# Altium PCB PCB1.PcbDoc
Units mil, origin at the board's own origin, x right, y up, seen from the top; angles counter-clockwise.
Board outline 3785 x 2850 mil, 2 copper layers (Top Layer, Bottom Layer); 22 components, 31 nets, 127 pads, 16 vias.
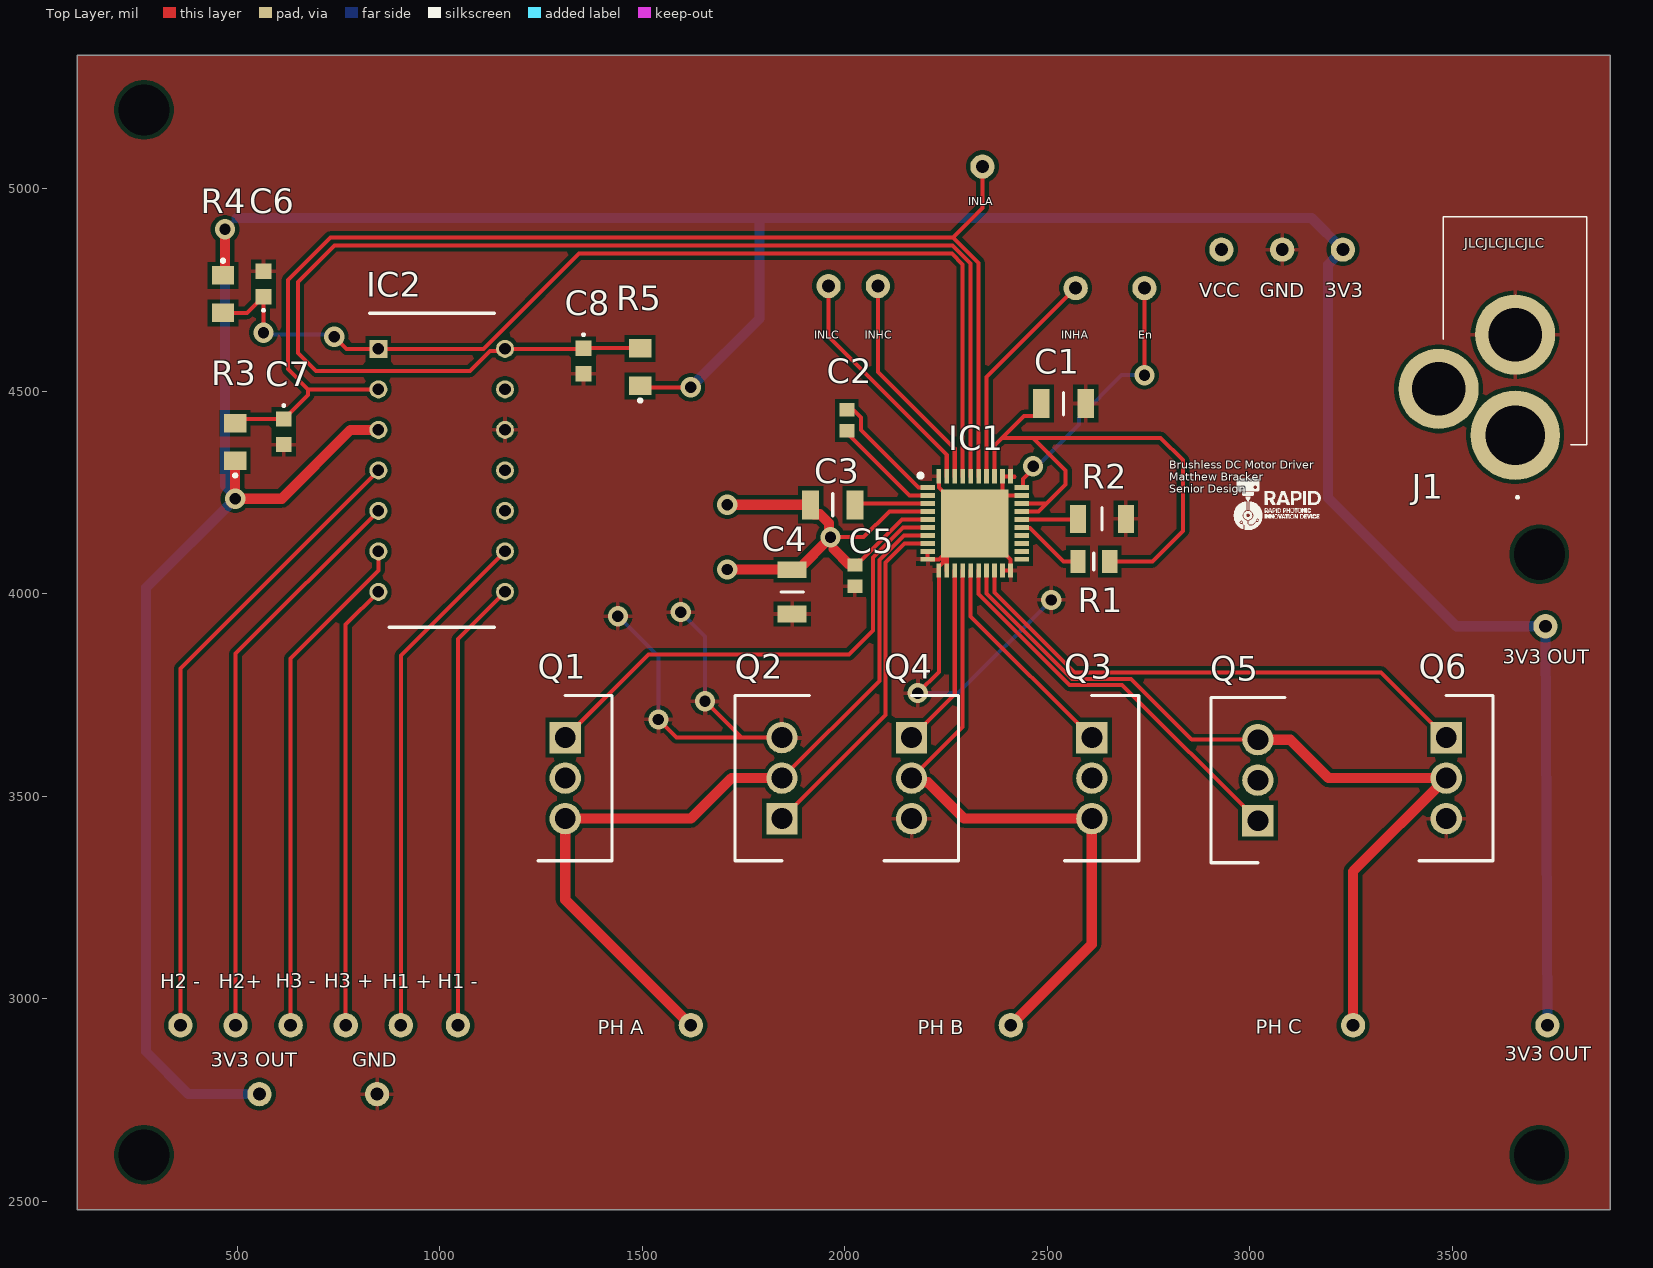
[diagram p0: Top Layer view]
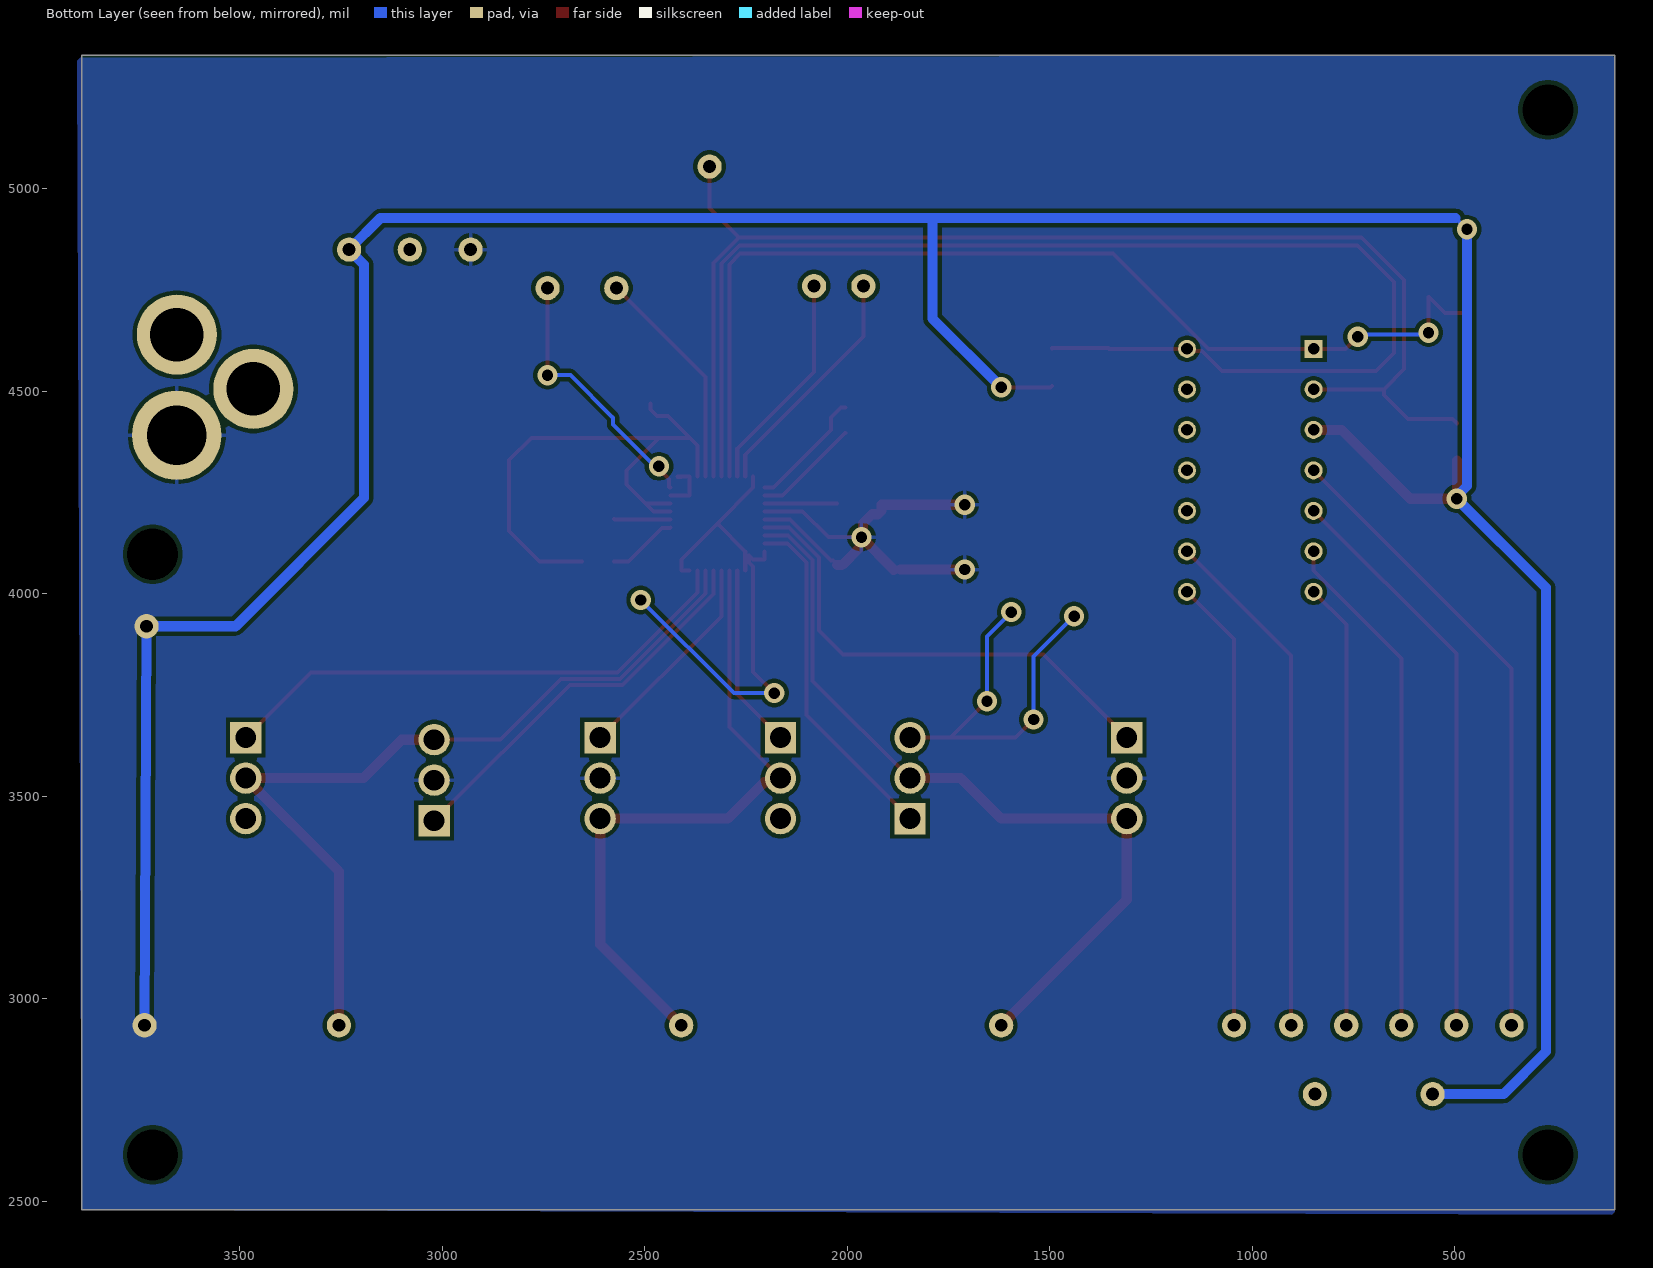
[diagram p1: Bottom Layer view, seen from below]
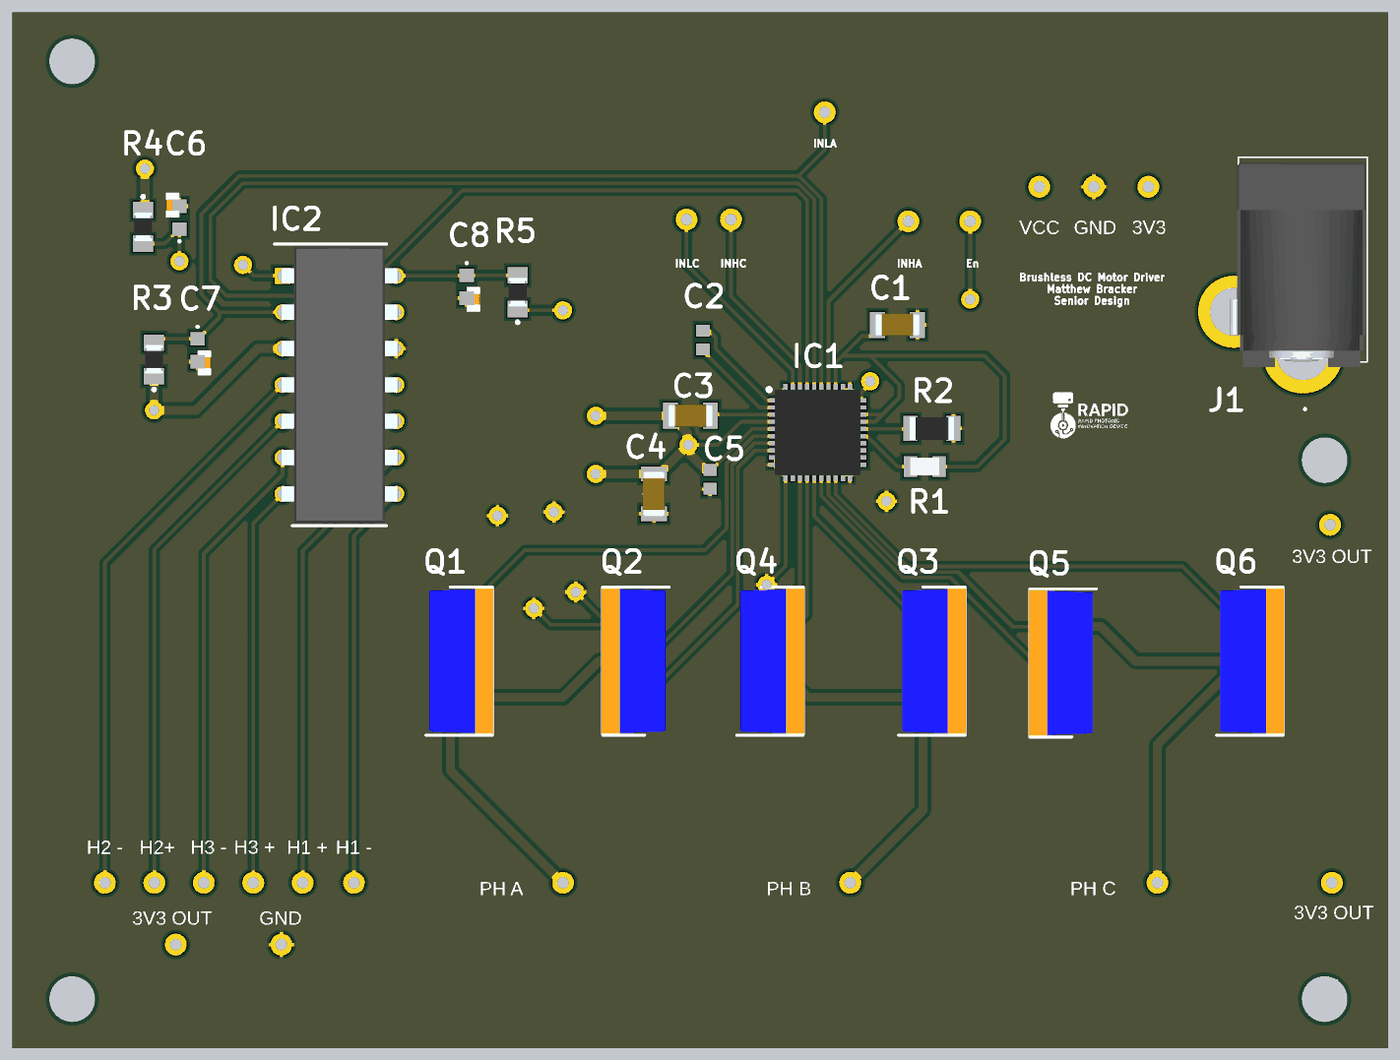
[diagram p2: 3D render of the assembled board from above, using the file's embedded part models]

## Layer stack, top to bottom
Top Solder: solder mask 0.4, Solder Resist, Dk 3.5
Top Layer: signal copper 1.4
Dielectric 1: dielectric 12.6, FR-4, Dk 4.8
Bottom Layer: signal copper 1.4
Bottom Solder: solder mask 0.4, Solder Resist, Dk 3.5

## Board outline
105,2480 3890,2480 3890,5330 105,5330

## Design rules (kind name [scope] priority, off if disabled: settings)
Clearance [All] p1: gap=10 ignorepadtopadclearanceinfootprint=FALSE except(3.94: Arc-SMDPad Track-SMDPad; 5: Arc-Arc Arc-Track Track-Track SMDPad-SMDPad)
HoleSize [All] p1: absolutevalues=TRUE maxlimit=248.03 minlimit=5.91 maxpercent=80.000 minpercent=20.000
MinimumSolderMaskSliver [All] p1: minsoldermaskwidth=5.12
PolygonConnect [All] p1: connectstyle=Relief reliefconductorwidth=10 reliefentries=4 polygonreliefangle="90 Angle" airgapwidth=10
RoutingVias [All] p1: holewidth=28 width=50 viastyle="Through Hole" minholewidth=28 minwidth=50 maxholewidth=28 maxwidth=50
SilkToSilkClearance [All] p1: silktosilkclearance=5.91
SilkToSolderMaskClearance [IsPad] p1: minsilkscreentomaskgap=5.91 clearancetoexposedcopper=TRUE
SolderMaskExpansion [All] p1: expansion=4 istentingtop=FALSE
SupplyNets "Schematic Supply Nets_1" [InNet('GND')] p1: voltage=0.000
SupplyNets "Schematic Supply Nets" [InNet('VCC')] p2: voltage=0.000
Width [All] p1: maxlimit=30 minlimit=10 preferedwidth=10 minimp=50.000000 maximp=50.000000 favimp=50.000000
26 further rules are at their usual default settings.

## Components (designator, comment, footprint, x,y, rotation, side; value= is the part's Value field where it differs from the comment)
C1 "CL31B105KBHNNNE" CAPC3216X180N 2540,4470 r0 top
C2 "CL10B473KB8NNNC" CAPC1608X90N 2005,4428.5 r90 top
C3 "CL31B105KBHNNNE" CAPC3216X180N 1970.47,4220 r0 top
C4 "CL31A106KBHNNNE" CAPC3216X180N 1870,4005 r90 top
C5 "CC0603KRX7R9BB104" CAPC1608X90N 2025,4045 r90 top
C6 "CL21B103KBANNNC" C0603 565,4765 r90 top
C7 "CL21B103KBANNNC" C0603 615,4400 r270 top
C8 "CL21B103KBANNNC" C0603 1355,4575 r270 top
IC1 "DRV8323HRTAR" QFN50P600X600X80-41N-D 2320.79,4173.86 r0 top
IC2 "LM339N" DIP794W53P254L1930H508Q14N 1005,4305 r0 top
J1 "DCJ200-10-A-K1-K" DCJ20010AK1K 3655,4391.97 r180 top
Q1 "STP100N10F7" TO254P465X1016X1935-3P 1310,3645 r270 top
Q2 "STP100N10F7" TO254P465X1016X1935-3P 1845,3445 r90 top
Q3 "STP100N10F7" TO254P465X1016X1935-3P 2610,3645 r270 top
Q4 "STP100N10F7" TO254P465X1016X1935-3P 2165,3645 r270 top
Q5 "STP100N10F7" TO254P465X1016X1935-3P 3020,3440 r90 top
Q6 "STP100N10F7" TO254P465X1016X1935-3P 3485,3645 r270 top
R1 "0805W8F1002T5E" RESC2012X50N 2615,4080 r0 top
R2 "0805W8F5103T5E" RESC3116X65N 2635,4185 r0 top
R3 "0805W8F4701T5E" ERJP06D1000V 495,4375 r90 top
R4 "0805W8F4701T5E" ERJP06D1000V 465,4740 r270 top
R5 "0805W8F4701T5E" ERJP06D1000V 1495,4560 r90 top

## Footprints (in the part's own frame and the unit in brackets; to place one, negate y for a bottom-side part, rotate by r counter-clockwise, add the part's x,y. Pads: shape width x height; smd on the part's side, far side on the other; paste and mask are expansions set on the pad)
C0603 [mm]
  rect 0.95x1 smd: 1(-0.8,0) 2(0.8,0)
  silkscreen extent -1.7,-0.05 -1.6,0.05, body extent 0,0 1.75,0.95
CAPC1608X90N [mm]
  rect 0.83x0.94 smd: 1(-0.66,0) 2(0.66,0)
CAPC3216X180N [mm]
  rect 1.05x1.82 smd: 1(-1.39,0) 2(1.39,0)
  silkscreen extent 0,-0.7 0,0.7, body extent -1.6,-0.8 1.6,0.8, height 1.8
DCJ20010AK1K [mm]
  round 5.604 hole 3.736: 1(0,0)
  round 5.028 hole 3.352: 2(0,-6.3) 3(4.8,-2.9)
  silkscreen extent -4.5,-13.7 4.5,3.95, body extent -4.41,-13.32 5.09,0.98, height 11.05
DIP794W53P254L1930H508Q14N [mm]
  rect 1.13x1.13 hole 0.73: 1(-3.97,7.62)
  round 1.13 hole 0.73: 2(-3.97,5.08) 3(-3.97,2.54) 4(-3.97,0) 5(-3.97,-2.54) 6(-3.97,-5.08) 7(-3.97,-7.62) 8(3.97,-7.62) 9(3.97,-5.08) 10(3.97,-2.54) 11(3.97,0) 12(3.97,2.54) 13(3.97,5.08) 14(3.97,7.62)
  silkscreen extent -4.53,-9.84 3.3,9.84, body extent -4.1,-9.65 4.1,9.65, height 5.08
ERJP06D1000V [mm]
  rect 1.15x1.4 smd: 1(-1.175,0) 2(1.175,0)
  silkscreen extent -2.2,-0.1 -2,0.1, body extent -1,-0.63 1,0.63, height 0.6
QFN50P600X600X80-41N-D [mm]
  rect 0.9x0.3 smd: 1(-2.95,2.25) 2(-2.95,1.75) 3(-2.95,1.25) 4(-2.95,0.75) 5(-2.95,0.25) 6(-2.95,-0.25) 7(-2.95,-0.75) 8(-2.95,-1.25) 9(-2.95,-1.75) 10(-2.95,-2.25) 21(2.95,-2.25) 22(2.95,-1.75) 23(2.95,-1.25) 24(2.95,-0.75) 25(2.95,-0.25) 26(2.95,0.25) 27(2.95,0.75) 28(2.95,1.25) 29(2.95,1.75) 30(2.95,2.25)
  rect 0.3x0.9 smd: 11(-2.25,-2.95) 12(-1.75,-2.95) 13(-1.25,-2.95) 14(-0.75,-2.95) 15(-0.25,-2.95) 16(0.25,-2.95) 17(0.75,-2.95) 18(1.25,-2.95) 19(1.75,-2.95) 20(2.25,-2.95) 31(2.25,2.95) 32(1.75,2.95) 33(1.25,2.95) 34(0.75,2.95) 35(0.25,2.95) 36(-0.25,2.95) 37(-0.75,2.95) 38(-1.25,2.95) 39(-1.75,2.95) 40(-2.25,2.95)
  rect 4.25x4.25 smd: 41(0,0)
  silkscreen extent -3.52,2.88 -3.27,3.12, body extent -3,-3 3,3, height 1
RESC2012X50N [mm]
  rect 0.95x1.45 smd: 1(-1,0) 2(1,0)
  silkscreen extent 0,-0.53 0,0.53, body extent -1,-0.62 1,0.63, height 0.45
RESC3116X65N [mm]
  rect 1x1.75 smd: 1(-1.5,0) 2(1.5,0)
  silkscreen extent 0,-0.7 0,0.7, body extent -1.55,-0.8 1.55,0.8, height 0.65
TO254P465X1016X1935-3P [mm]
  rect 1.965x1.965 hole 1.31: 1(0,0)
  round 1.965 hole 1.31: 2(2.54,0) 3(5.08,0)
  silkscreen extent -2.64,-1.71 7.72,2.94, body extent -2.54,-1.44 7.62,3.01, height 18.95

## Part data
C1 C3: "Capacitor", Manufacturer_Name=SAMSUNG, Mouser Part Number=187-CL31B105KBHNNNE, Arrow Part Number=CL31B105KBHNNNE, Arrow Price/Stock=https://www.arrow.com/en/products/cl31b105kbhnnne/samsung-electro-mechanics?utm_currency=USD&region=europe, Datasheet Link=https://datasheet.datasheetarchive.com/originals/distributors/Datasheets_SAMA/5cd9a1c15dad09a7278f50cb1a2e4a6e.pdf, Height=1.8mm, Manufacturer_Part_Number=CL31B105KBHNNNE, Mouser Price/Stock=https://www.mouser.co.uk/ProductDetail/Samsung-Electro-Mechanics/CL31B105KBHNNNE?qs=349EhDEZ59oPJzVuH4J5mw%3D%3D
C2: "Capacitor", Manufacturer_Name=SAMSUNG, Mouser Part Number=187-CL10B473KB8NNNC, Arrow Part Number=CL10B473KB8NNNC, Arrow Price/Stock=https://www.arrow.com/en/products/cl10b473kb8nnnc/samsung-electro-mechanics, Datasheet Link=https://datasheet.lcsc.com/szlcsc/Samsung-Electro-Mechanics-CL10B473KB8NNNC_C1622.pdf, Height=0.9mm, Manufacturer_Part_Number=CL10B473KB8NNNC, Mouser Price/Stock=https://www.mouser.co.uk/ProductDetail/Samsung-Electro-Mechanics/CL10B473KB8NNNC?qs=349EhDEZ59qFPSQy5thgNA%3D%3D
C4: library part CMP-003-000001-1, "Capacitor", Manufacturer_Name=SAMSUNG, Mouser Part Number=187-CL31A106KBHNNNE, Arrow Part Number=CL31A106KBHNNNE, Arrow Price/Stock=https://www.arrow.com/en/products/cl31a106kbhnnne/samsung-electro-mechanics?utm_currency=USD&region=nac, Datasheet Link=https://datasheet.datasheetarchive.com/originals/distributors/Datasheets_SAMA/08745f6325ae1679773301b11fb0567f.pdf, Design Item ID=CL31A106KBHNNNE, Height=1.8mm, Manufacturer_Part_Number=CL31A106KBHNNNE, Mouser Price/Stock=https://www.mouser.co.uk/ProductDetail/Samsung-Electro-Mechanics/CL31A106KBHNNNE?qs=X6jEic%2FHinBsSMnC%2FFnmbg%3D%3D, Source=SamacSys.SchLib
C5: "Capacitor", Manufacturer_Name="Yageo Group", Mouser Part Number=603-CC603KRX7R9BB104, Arrow Part Number=CC0603KRX7R9BB104, Arrow Price/Stock=https://www.arrow.com/en/products/cc0603krx7r9bb104/yageo?utm_currency=USD&region=europe, Datasheet Link=https://componentsearchengine.com/Datasheets/2/CC0603KRX7R9BB104.pdf, Height=0.9mm, Manufacturer_Part_Number=CC0603KRX7R9BB104, Mouser Price/Stock=https://www.mouser.co.uk/ProductDetail/YAGEO/CC0603KRX7R9BB104?qs=vTakOoo5QyLvVCYM2ge8LQ%3D%3D
C6 C7 C8: "Capacitor", Manufacturer_Name=SAMSUNG, Mouser Part Number=187-CL21B103KBANNNC, Arrow Part Number=CL21B103KBANNNC, Arrow Price/Stock=https://www.arrow.com/en/products/cl21b103kbannnc/samsung-electro-mechanics?utm_currency=USD&region=nac, Datasheet Link=https://datasheet.datasheetarchive.com/originals/distributors/Datasheets_SAMA/97c54fb7f716f6f5bd35dfc2c9b17795.pdf, Height=0.75mm, Manufacturer_Part_Number=CL21B103KBANNNC, Mouser Price/Stock=https://www.mouser.co.uk/ProductDetail/Samsung-Electro-Mechanics/CL21B103KBANNNC?qs=349EhDEZ59oTK9iJ%2FqCMuw%3D%3D
IC1: "Integrated Circuit", Manufacturer_Name="Texas Instruments", Mouser Part Number=595-DRV8323HRTAR, Arrow Part Number=DRV8323HRTAR, Arrow Price/Stock=https://www.arrow.com/en/products/drv8323hrtar/texas-instruments?utm_currency=USD&region=nac, Datasheet Link=http://www.ti.com/lit/gpn/drv8323, Height=0.8mm, Manufacturer_Part_Number=DRV8323HRTAR, Mouser Price/Stock=https://www.mouser.co.uk/ProductDetail/Texas-Instruments/DRV8323HRTAR?qs=u4fy%2FsgLU9N%252BsI8bz2iwaQ%3D%3D
IC2: "Integrated Circuit", Manufacturer_Name="Texas Instruments", Mouser Part Number=595-LM339N, Arrow Part Number=LM339N, Arrow Price/Stock=https://www.arrow.com/en/products/lm339n/texas-instruments?region=nac, Datasheet Link=https://componentsearchengine.com/Datasheets/2/LM339N.pdf, Height=5.08mm, Manufacturer_Part_Number=LM339N, Mouser Price/Stock=https://www.mouser.co.uk/ProductDetail/Texas-Instruments/LM339N?qs=rshUhwi3fbY%252BaR%252BOl3edNw%3D%3D
J1: "Connector", Manufacturer_Name="GCT (GLOBAL CONNECTOR TECHNOLOGY)", Mouser Part Number=640-DCJ200-10-A-K1-K, Datasheet Link=https://gct.co/files/drawings/dcj200-10.pdf, Height=11mm, Manufacturer_Part_Number=DCJ200-10-A-K1-K, Mouser Price/Stock=https://www.mouser.co.uk/ProductDetail/GCT/DCJ200-10-A-K1-K?qs=KUoIvG%2F9Ilayx8ZZ1Qrlrg%3D%3D
Q1 Q2 Q3 Q4 Q5 Q6: "MOSFET (N-Channel)", Manufacturer_Name=STMicroelectronics, Mouser Part Number=511-STP100N10F7, Datasheet Link=https://www.st.com/resource/en/datasheet/stb100n10f7.pdf, Height=4.6mm, Manufacturer_Part_Number=STP100N10F7, Mouser Price/Stock=https://www.mouser.com/Search/Refine.aspx?Keyword=511-STP100N10F7
R1: "Resistor", Manufacturer_Name=UniOhm, Height=0.65mm, Manufacturer_Part_Number=0805W8F1002T5E
R2 R3 R4 R5: "Resistor", Manufacturer_Name="UNI-ROYAL(Uniroyal Elec)", Height=0.65mm
  R2: Datasheet Link=https://datasheet.lcsc.com/szlcsc/Uniroyal-Elec-0805W8F5103T5E_C17733.pdf, Manufacturer_Part_Number=0805W8F5103T5E
  R3 R4 R5: Datasheet Link=https://datasheet.lcsc.com/szlcsc/Uniroyal-Elec-0805W8F4701T5E_C17673.pdf, Manufacturer_Part_Number=0805W8F4701T5E

## Free pads (board coordinates)
  round 60 hole 31.5: "3v3 OUT"(555,2765) 3v3In(3230,4850) 9(1620,2935) 10(2410,2935) 11(3255,2935) 12(2930,4850) 13(845.36,2765) 13(3080,4850) 17(3730,3920) 17(3735,2935) EN(2740,4755) INHA(360,2935) INHA(496,2935) INHA(632,2935) INHA(768,2935) INHA(904,2935) INHA(1045,2935) INHA(2340,5055) INHA(2570,4755) INHC(2082,4760) INLC(1960,4760)
  round 60 hole 125.98 unplated: 17(270,2615) 17(270,5195) 17(3715,2615) 17(3715,4097.81)

## Via types
v1: diameter 50, hole 28, Top Layer to Bottom Layer, 16 vias

## Nets (pads, with @x,y where several pads share a name; then routed paths per layer and width w, separated by ;. In a path a pad name is that pad's centre, name@x,y a point inside that pad or via, vN(x,y) a via of type N, cw(c..) or ccw(c..) an arc to the next point about the centre after c; other vN are vias at no path point)
GND: C1.2 C4.1 C5.1 C6.2 C7.2 C8.2 IC1.9 IC1.10 IC1.11 IC1.12 IC1.19 IC1.20 IC1.29 IC1.31 IC1.32 IC1.40 IC1.41 IC2.12 J1.2 pad.13 Q2.3 Q4.3 Q6.3 R2.2 | length 2439
  Top Layer w10: v1(1540,3690) 1585,3645 Q2.3 ; v1(1655,3735) 1745,3645 ; v1(2180,3755) 2232.2,3807.2 IC1.11 2232.2,4068 2242.13,4077.92 2242.13,4095.2 2232.2,4085.28 IC1.10 IC1.9 ; IC1.40 2232.2,4262.44 IC1.41 ; IC1.12 2251.89,4104.96 IC1.41 ; IC1.19 IC1.20 2409.37,4085.28 IC1.41 ; 2419.22,4289.22 2410.15,4289.22 IC1.31 IC1.32 2389.68,4242.76 IC1.29
  Bottom Layer w10: v1(1440,3945) 1540,3845 v1(1540,3690) ; v1(1595,3955) 1655,3895 v1(1655,3735) ; v1(2180,3755) 2280,3755 v1(2510,3985)
NetC1_1: C1.1 IC1.27 IC1.28 IC1.33 R1.2 | length 1444.6
  Top Layer w10: IC1.33 2370,4366.57 2388.43,4385 ; IC1.27 2478.39,4203.39 2498.07,4223.07 ; IC1.28 2498.07,4223.07 ; C1.1 2485.28,4454.84 2469.61,4439.17 2442.6,4439.17 2388.43,4385 ; R1.2 2760,4080 2835,4155 2835,4330 2780,4385 2465,4385 ; 2388.43,4385 2465,4385 ; 2465,4385 2545,4305 2545,4270 2498.07,4223.07
NetC2_1: C2.1 IC1.2 | length 263.5
  Top Layer w10: C2.1@2005,4397.01 2005.98,4397.01 2160.24,4242.76 IC1.2
NetC2_2: C2.2 IC1.1 | length 299.1
  Top Layer w10: C2.2@2005,4460 2015,4460 2040,4435 2040,4405 2182.56,4262.44 IC1.1
NetC3_2: C3.2 IC1.3 | length 179.4
  Top Layer w10: C3.2@2025.2,4223.07 IC1.3
NetC6_1: C6.1 IC1.37 IC2.1 R4.2 | length 2579.8
  Top Layer w10: R4.2 524.25,4693.74 564.02,4733.5 C6.1 v1(565,4645) ; v1(740,4635) 770,4605 IC2.1 1108.63,4605 1343.63,4840 2265,4840 2291.26,4813.74 IC1.37
  Bottom Layer w10: v1(565,4645) 570,4640 735,4640 v1(740,4635)
NetC7_1: C7.1 IC1.35 IC2.2 pad.INHA@2340,5055 R3.2 | length 3193.8
  Top Layer w10: R3.2 505.24,4431.5 C7.1 ; C7.1@615.98,4431.5 675,4490.51 675,4505 ; IC2.2 675,4505 ; IC1.35 2330.63,4816.8 2267.43,4880 ; pad.INHA@2340,5055 2340,4952.57 2267.43,4880 ; 675,4505 625,4555 625,4775 730,4880 760,4880 2267.43,4880
NetC8_1: C8.1 IC1.36 IC2.14 R5.2 | length 3304.2
  Top Layer w10: R5.2 1494.76,4606.5 C8.1 1353.5,4605 IC2.14 1155.51,4599.21 1124.06,4599.21 1074.84,4550 695,4550 650,4595 650,4770 740,4860 760,4860 2266.21,4860 2310.94,4815.27 IC1.36
NetIC1_6: IC1.6 Q1.1 | length 1215.1
  Top Layer w10: Q1.1 1515,3850 2010,3850 2070,3910 2070,4090 2144.02,4164.02 IC1.6
NetIC1_7: IC1.7 pad.9 Q1.3 Q2.2 | length 1997.5
  Top Layer w10: Q2.2 2085.29,3785.29 2085.29,4083.67 2145.96,4144.33 IC1.7
  Top Layer w25: pad.9 1310,3245 Q1.3 1620,3445 1720,3545 Q2.2
NetIC1_8: IC1.8 Q2.1 | length 861.9
  Top Layer w10: Q2.1 2100.59,3700.59 2100.59,4077.33 2147.9,4124.65 IC1.8
NetIC1_13: IC1.13 Q4.1 | length 456.9
  Top Layer w10: Q4.1 2271.57,3751.57 IC1.13
NetIC1_14: IC1.14 pad.10 Q3.3 Q4.2 | length 1644.3
  Top Layer w10: Q4.2 2291.26,3671.26 IC1.14
  Top Layer w25: Q4.2 2175.02,3534.98 2205.02,3534.98 2295,3445 Q3.3 2610,3135 pad.10
NetIC1_15: IC1.15 Q3.1 | length 536.6
  Top Layer w10: IC1.15 2310.94,3944.06 Q3.1
NetIC1_16: IC1.16 Q5.1 | length 979.4
  Top Layer w10: IC1.16 2330.63,3999.37 2555,3775 2685,3775 Q5.1
NetIC1_17: IC1.17 pad.11 Q5.3 Q6.2 | length 2085.4
  Top Layer w10: IC1.17 2350.32,4001.31 2561.33,3790.29 2706.41,3790.29 2856.7,3640 Q5.3
  Top Layer w25: Q5.3 3100,3640 3195,3545 Q6.2 3255,3315 pad.11
NetIC1_18: IC1.18 Q6.1 | length 1317.9
  Top Layer w10: IC1.18 2370,4003.26 2567.67,3805.59 3324.41,3805.59 Q6.1
NetIC1_25: IC1.25 R1.1 | length 173.5
  Top Layer w10: IC1.25 2437.83,4163.11 2456.89,4163.11 2540,4080 R1.1
NetIC1_26: IC1.26 R2.1 | length 139.6
  Top Layer w10: IC1.26 2574.65,4183.7 R2.1
NetIC1_30: IC1.30 pad.EN | length 658.6
  Top Layer w10: IC1.30 2439.09,4262.44 2440,4263.35 2440,4283.43 2465,4308.43 v1(2465,4315) ; v1(2740,4540) pad.EN
  Bottom Layer w10: v1(2465,4315) 2475,4315 2577.87,4417.87 2577.87,4434.79 2683.08,4540 v1(2740,4540)
NetIC1_34: IC1.34 pad.INHA@2570,4755 | length 556.3
  Top Layer w10: IC1.34 2350.32,4321.9 2350,4322.22 2350,4535 pad.INHA@2570,4755
NetIC1_38: IC1.38 pad.INHC | length 548.5
  Top Layer w10: pad.INHC 2082,4548 2271.57,4358.43 IC1.38
NetIC1_39: IC1.39 pad.INLC | length 590.9
  Top Layer w10: pad.INLC 1960,4635 2251.89,4343.11 IC1.39
NetIC2_3: "pad.3v3 OUT" IC2.3 pad.3v3In pad.17@3730,3920 pad.17@3735,2935 R3.1 R4.1 R5.1 | length 8783.2
  Top Layer w10: R4.1 R4.1@470,4791.26 ; R5.1 1498.74,4510 v1(1620,4510)
  Top Layer w25: R4.1@470,4791.26 v1(470,4900) ; R3.1 v1(495,4235) 610,4235 780,4405 IC2.3
  Bottom Layer w10: v1(470,4900) 498.28,4928.28
  Bottom Layer w25: v1(470,4900) 470,4266.57 v1@495,4241.57 ; v1(495,4235) 275,4015 275,2870 380,2765 555,2765 ; 498.28,4928.28 610,4928.28 1790,4928.28 ; v1(1620,4510) 1790,4680 1790,4928.28 ; pad.17@3735.44,2935 3730,3920 3510,3920 3192.88,4237.12 3192.88,4812.88 pad.3v3In 3151.72,4928.28 1790,4928.28
NetIC2_4: IC2.4 pad.INHA@360,2935 | length 1572.4
  Top Layer w10: pad.INHA@360,2935 360,3816.3 IC2.4
NetIC2_5: IC2.5 pad.INHA@496,2935 | length 1416.1
  Top Layer w10: pad.INHA@496,2935 496,3852.3 IC2.5
NetIC2_6: IC2.6 pad.INHA@632,2935 | length 1259.8
  Top Layer w10: pad.INHA@632,2935 632,3840.97 848.7,4057.67 IC2.6
NetIC2_7: IC2.7 pad.INHA@768,2935 | length 1103.4
  Top Layer w10: pad.INHA@768,2935 768,3924.3 IC2.7
NetIC2_8: IC2.8 pad.INHA@1045,2935 | length 1118.2
  Top Layer w10: pad.INHA@1045,2935 1045,3888.7 IC2.8
NetIC2_9: IC2.9 pad.INHA@904,2935 | length 1276.6
  Top Layer w10: pad.INHA@904,2935 904,3847.7 IC2.9
VCC: C3.1 C4.2 C5.2 IC1.4 IC1.5 J1.1 pad.12 Q1.2 Q3.2 Q5.2 | length 1196.6
  Top Layer w10: C4.2@1869.72,4060 C4.2 C4.2@1885.16,4059.72 ; v1@1965,4139.57 v1(1965,4140) ; 1972.65,4110.97 1972.65,4132.35 v1(1965,4140) ; C5.2@2025,4071.98 2035.34,4082.32 2040.12,4082.32 2141.49,4183.7 IC1.5 ; IC1.4 2109.97,4203.39 2046.58,4140 v1(1965,4140)
  Top Layer w25: v1(1710,4060) C4.2@1869.72,4060 ; v1(1710,4220) C3.1 1915.75,4204.84 1923.92,4196.67 1939.07,4196.67 1961.18,4174.57 1961.18,4143.82 v1(1965,4140) ; C4.2@1885.16,4059.72 v1@1965,4139.57 ; 1972.65,4110.97 2012.64,4070.98 C5.2
pads on no net: IC1.21 IC1.22 IC1.23 IC1.24 IC2.10 IC2.11 IC2.13 J1.3

## Polygon pours and split planes (outlines as drawn)
GND on Top Layer "GND_L01_P000" (solid, pour order 0): 105,5330 3890,5330 3890,2480 105,2480
VCC on Bottom Layer "VCC_L02_P001" (solid, pour order 1): 105,5330 3901.28,5323.47 3890,2480 105,2466.95

## Silkscreen, mask and mechanical layers (free items; w line width, h text height)
Top Overlay:
  drawing of 41 lines, arcs and shapes, not listed
  text "INLA" at 2305,4959.38 h20
  text "JLCJLCJLCJLC" at 3529.92,4845.42 h40
  text "3V3" at 3185,4720.54 h60
  text "VCC" at 2875,4720 h60
  text "GND" at 3025,4720 h60
  text "INLC" at 1925,4629.38 h20
  text "INHC" at 2050,4629.38 h20
  text "INHA" at 2535,4629.38 h20
  text "En" at 2725,4629.38 h20
  text "Brushless DC Motor Driver / Matthew Bracker / Senior Design" at 2801.72,4249.35 h20
  text "3V3 OUT" at 3625,3815 h60
  text "H3 -" at 595,3015 h60
  text "H3 +" at 715,3015 h60
  text "H2 -" at 310,3014.33 h60
  text "H2+" at 455,3014.33 h60
  text "H1 +" at 860,3014.33 h60
  text "H1 -" at 995,3014.33 h60
  text "PH C" at 3015,2901.62 h60
  text "PH A" at 1390,2901 h60
  text "PH B" at 2180,2901 h60
  text "3V3 OUT" at 3630,2835 h60
  text "3V3 OUT" at 435,2820 h60
  text "GND" at 784.45,2819.96 h60